# Altium PCB Bending_Machine_PCB.PcbDoc
Units mm, origin at the board's own origin, x right, y up, seen from the top; angles counter-clockwise.
Board outline 121.92 x 83.82 mm, 2 copper layers (Top Layer, Bottom Layer); 32 components, 46 nets, 197 pads, 33 vias.
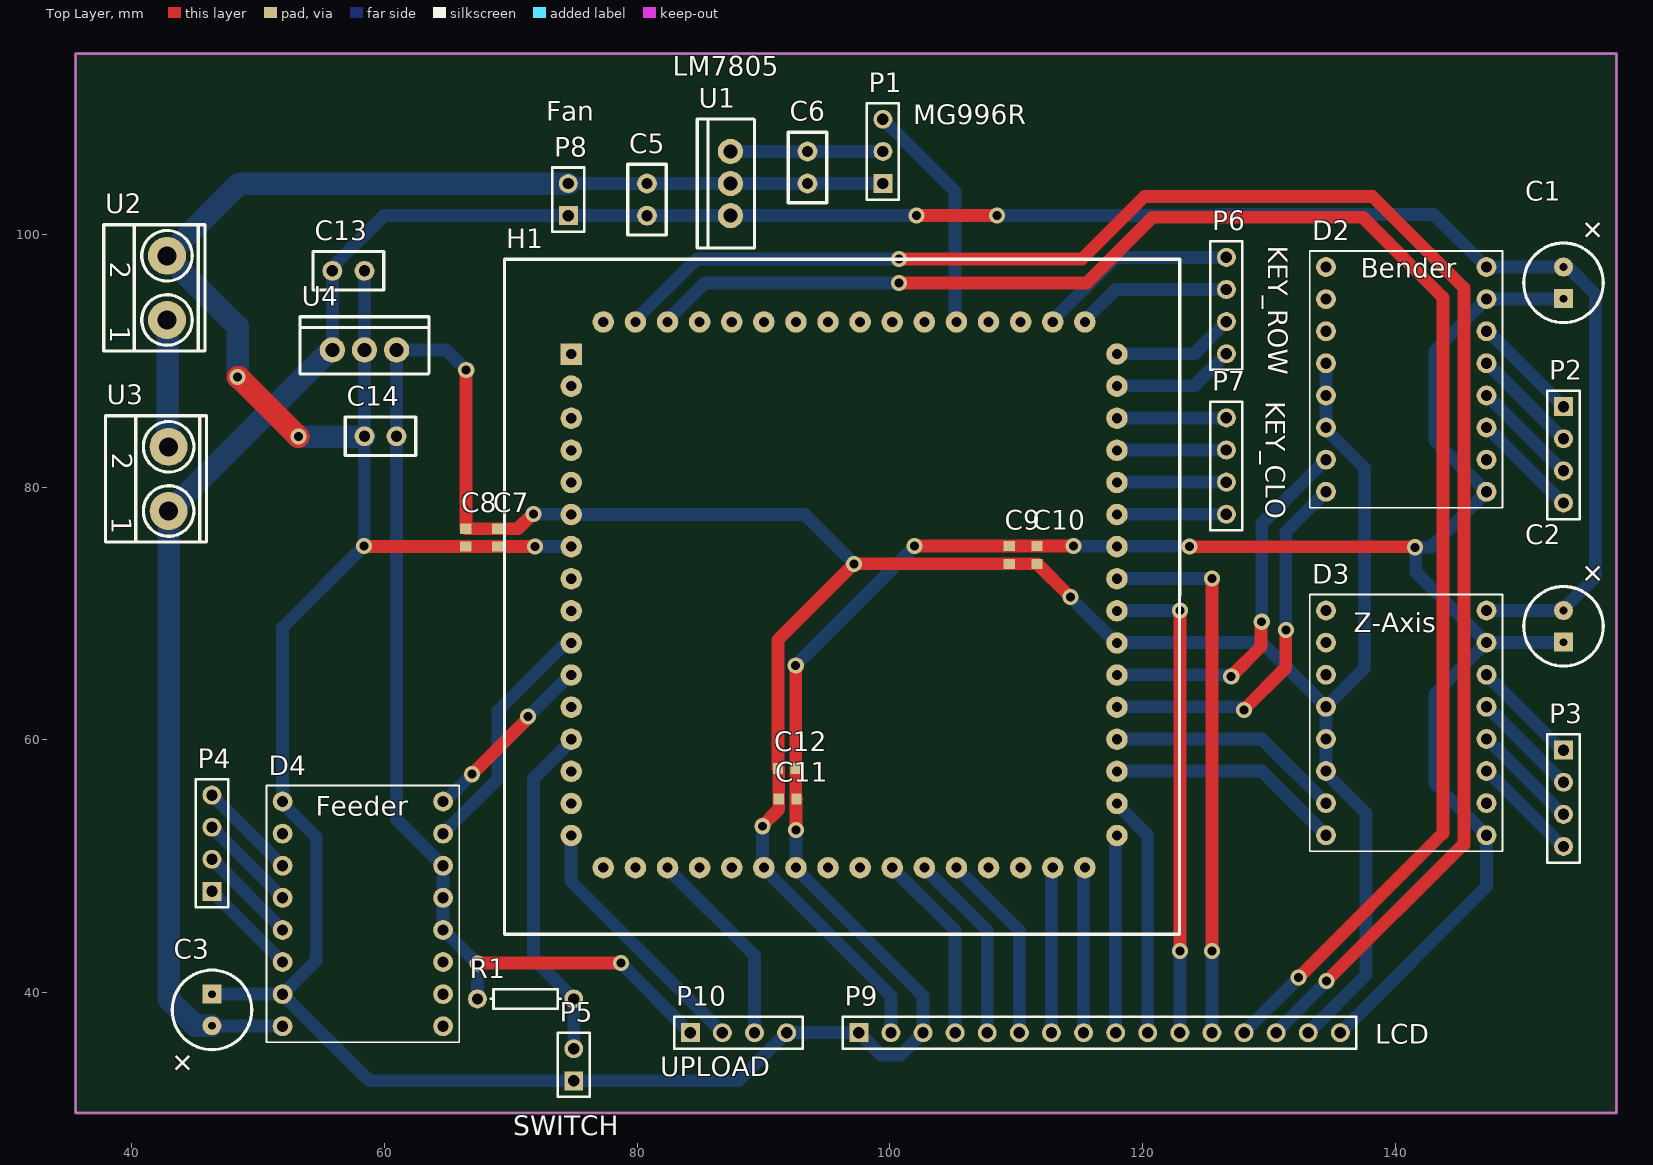
[diagram p0: Top Layer view]
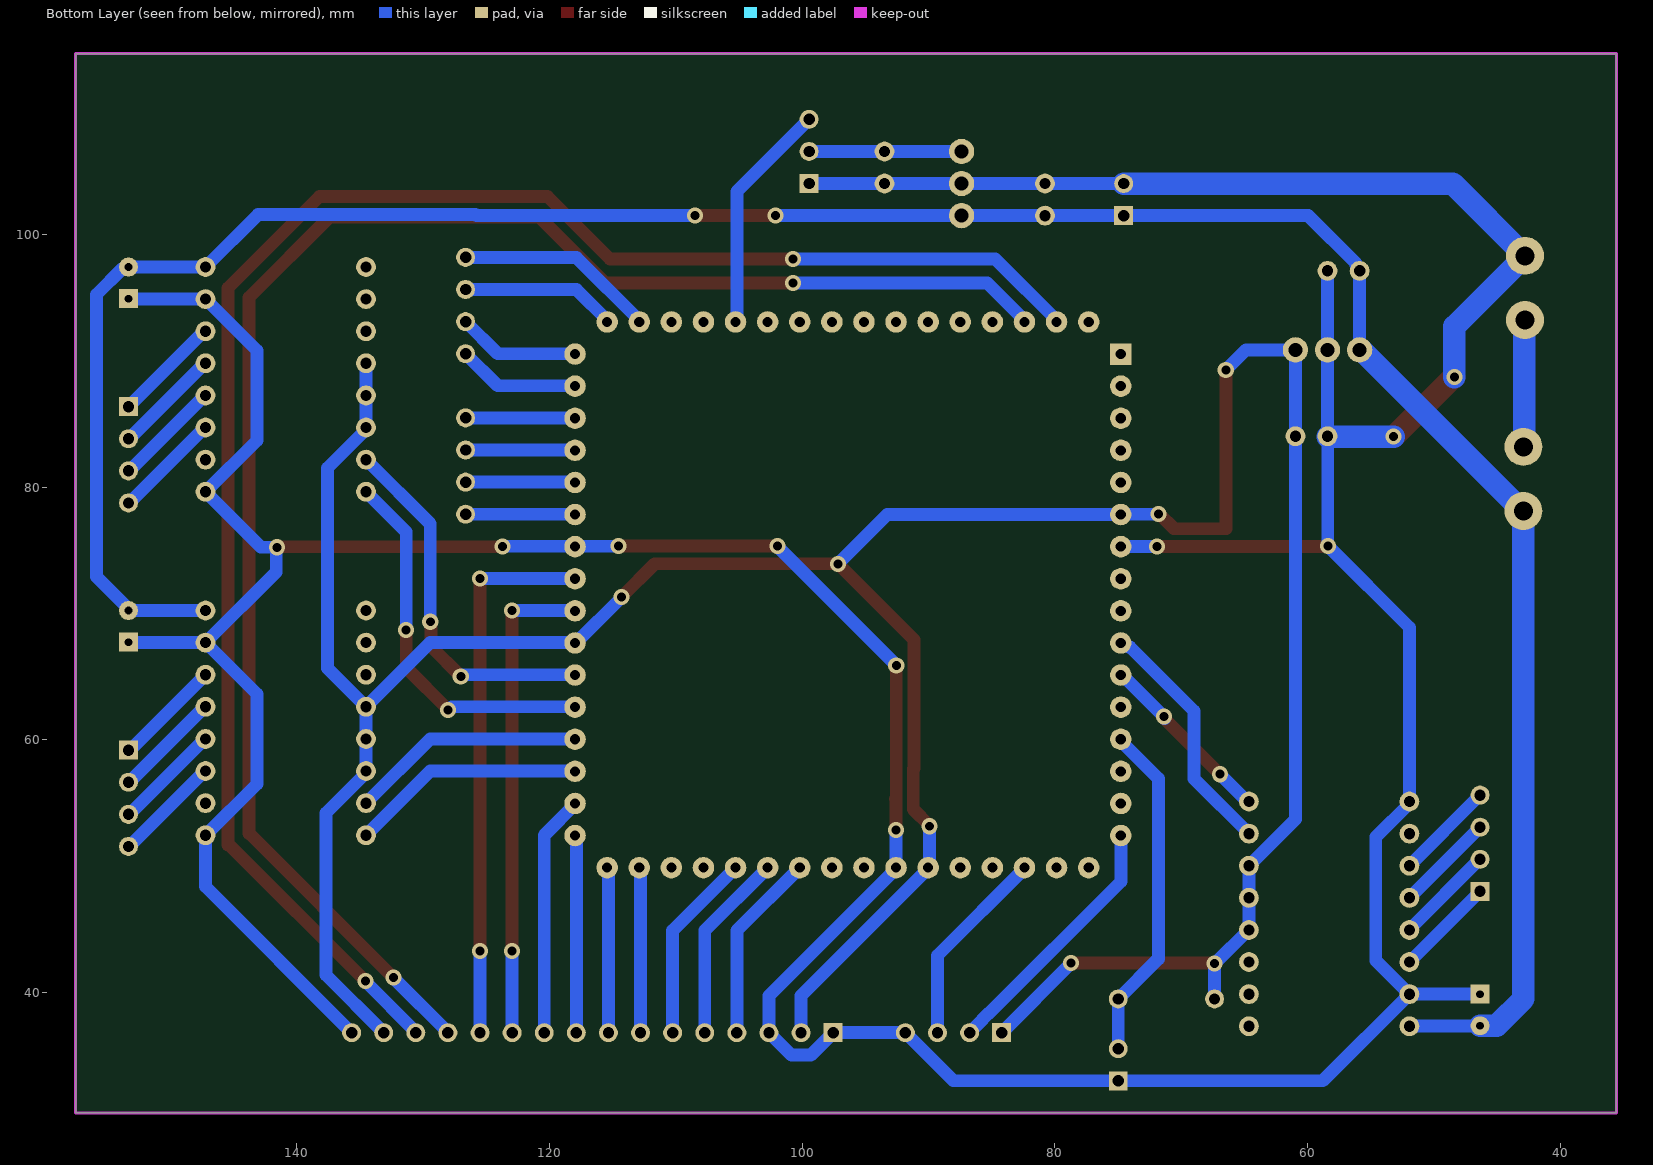
[diagram p1: Bottom Layer view, seen from below]

## Layer stack, top to bottom
Top Solder: solder mask 0.0102, Solder Resist, Dk 3.5
Top Layer: signal copper 0.0356
Dielectric 1: dielectric 0.32, FR-4, Dk 4.8
Bottom Layer: signal copper 0.0356
Bottom Solder: solder mask 0.0102, Solder Resist, Dk 3.5

## Board outline
35.56,30.48 35.56,114.3 157.48,114.3 157.48,30.48

## Design rules (kind name [scope] priority, off if disabled: settings)
Clearance [All] p1: gap=0.254 ignorepadtopadclearanceinfootprint=FALSE except(0: Arc-Hole Track-Hole SMDPad-Hole THPad-Hole Via-Hole Fill-Hole Poly-Hole Region-Hole Text-Hole)
PolygonConnect [All] p1: connectstyle=Relief reliefconductorwidth=0.254 reliefentries=4 polygonreliefangle="90 Angle" airgapwidth=0.254
RoutingVias [All] p1: holewidth=0.711 width=1.27 viastyle="Through Hole" minholewidth=0.711 minwidth=1.27 maxholewidth=0.711 maxwidth=1.27
SolderMaskExpansion [All] p1: expansion=0.102 istentingtop=FALSE
Width [All] p1: maxlimit=1.778 minlimit=0.254 preferedwidth=1.016 minimp=50.000000 maximp=50.000000 favimp=50.000000
30 further rules are at their usual default settings.

## Components (designator, comment, footprint, x,y, rotation, side; value= is the part's Value field where it differs from the comment)
C1 "Cap Pol1" Cap_100uF 153.162,102.87 r270 top value=100uF
C2 "Cap Pol1" Cap_100uF 153.162,75.692 r270 top value=100uF
C3 "Cap Pol1" Cap_100uF 46.482,31.918 r90 top value=100uF
C5 "Cap Pol1" Cap_0.47uF 85.471,102.743 r180 top value=0.47uF
C6 "Cap Pol1" Cap_0.47uF 88.773,105.283 r0 top value=0.47uF
C7 "Cap Semi" 1608[0603] 68.961,75.997 r90 top value=0.1uF
C8 "Cap Semi" 1608[0603] 66.446,75.997 r90 top value=2.2uF
C9 "Cap Semi" 1608[0603] 109.449,74.625 r90 top value=2.2uF
C10 "Cap Semi" 1608[0603] 111.633,74.625 r90 top value=0.1uF
C11 "Cap Semi" 1608[0603] 91.897,55.321 r180 top value=2.2uF
C12 "Cap Semi" 1608[0603] 91.846,57.734 r180 top value=0.1uF
C13 "Cap Pol1" Cap_0.47uF 57.15,92.405 r90 top value=0.47uF
C14 "Cap Pol1" Cap_0.47uF 59.69,88.722 r270 top value=0.47uF
D2 "DRV8825" DRV8825 135.509,124.079 r270 top
D3 "DRV8825" DRV8825 135.509,96.901 r270 top
D4 "DRV8825" DRV8825 63.627,10.668 r90 top
H1 "HT66F2390" HT66F2390_Bord 71.808,65.036 r0 top
P1 "MG996R" HDR1X3 99.441,104.013 r90 top
P2 "NEMA23" HDR1X4#1 153.289,86.36 r270 top
P3 "NEMA17" HDR1X4#1 153.289,59.182 r270 top
P4 "NEMA17" HDR1X4#1 46.355,48.006 r90 top
P5 "MicroSwitch" HDR1X2 74.981,33.02 r90 top
P6 "Row" HDR1X4#2 126.619,90.551 r90 top
P7 "Column" HDR1X4#2 126.619,77.851 r90 top
P8 "Fan" HDR1X2 74.549,101.473 r90 top
P9 "LCD" HDR1X16 97.536,36.83 r0 top
P10 "Upload" HDR1X4#1 84.201,36.83 r0 top
R1 "Res1" AXIAL-0.3 71.171,39.497 r0 top value=1K
U1 "LM7805" LM7805 87.376,110.871 r270 top
U2 "Terminal_Block" "terminal block" 49.215,97.803 r180 top
U3 "Terminal_Block" "terminal block" 49.342,82.69 r180 top
U4 "LM7805" LM7805 65.278,90.856 r180 top

## Footprints (in the part's own frame and the unit in brackets; to place one, negate y for a bottom-side part, rotate by r counter-clockwise, add the part's x,y. Pads: shape width x height; smd on the part's side, far side on the other; paste and mask are expansions set on the pad)
1608[0603] [mm] "Chip Capacitor, Body 1.6x0.8mm, IPC High Density"
  rect 0.8x0.9 smd: 1(-0.7,0) 2(0.7,0)
  body extent -0.87,-0.48 0.87,0.48, height 1.3
AXIAL-0.3 [mm] "Axial Device, Thru-Hole; 2 Leads; 0.3 in Pin Spacing"
  round 1.5 hole 0.9: 1(-3.81,0) 2(3.81,0)
  silkscreen extent -2.77,-0.76 2.77,0.76
Cap_0.47uF [mm]
  round 1.57 hole 0.89 paste+0 mask+0.051: 1(4.699,1.27) 2(4.699,-1.27)
  silkscreen extent 3.17,-2.79 6.22,2.79
Cap_100uF [mm]
  round 1.5 hole 0.6 paste+0 mask+0.051: 1(5.461,0.127)
  rect 1.5x1.5 hole 0.6 paste+0 mask+0.051: 2(7.96,0.127)
  silkscreen extent 3.56,-3.02 9.86,3.28
DRV8825 [mm]
  round 1.57 hole 0.89 paste+0 mask+0.051: 1(26.67,-1.016) 2(29.21,-1.016) 3(31.75,-1.016) 4(34.29,-1.016) 5(36.83,-1.016) 6(39.37,-1.016) 7(41.91,-1.016) 8(44.45,-1.016) 9(44.45,11.684) 10(41.91,11.684) 11(39.37,11.684) 12(36.83,11.684) 13(34.29,11.684) 14(31.75,11.684) 15(29.21,11.684) 16(26.67,11.684)
  silkscreen extent 25.4,-2.29 45.72,12.95
HDR1X2 [mm] "Connector; Header; 2 Position"
  rect 1.5x1.5 hole 0.9: 1(0,0)
  round 1.5 hole 0.9: 2(2.54,0)
  silkscreen extent -1.27,-1.27 3.81,1.27
HDR1X3 [mm] "Connector; Header; 3 Position"
  rect 1.5x1.5 hole 0.9: 1(0,0)
  round 1.5 hole 0.9: 2(2.54,0) 3(5.08,0)
  silkscreen extent -1.27,-1.27 6.35,1.27
HDR1X4#1 [mm] "Connector; Header; 4 Position"
  rect 1.5x1.5 hole 0.9: 1(0,0)
  round 1.5 hole 0.9: 2(2.54,0) 3(5.08,0) 4(7.62,0)
  silkscreen extent -1.27,-1.27 8.89,1.27
HDR1X4#2 [mm] "Connector; Header; 4 Position"
  round 1.5 hole 0.9: 1(0,0) 2(2.54,0) 3(5.08,0) 4(7.62,0)
  silkscreen extent -1.27,-1.27 8.89,1.27
HDR1X16 [mm] "Connector; Header; 16 Position"
  rect 1.5x1.5 hole 0.9: 1(0,0)
  round 1.5 hole 0.9: 2(2.54,0) 3(5.08,0) 4(7.62,0) 5(10.16,0) 6(12.7,0) 7(15.24,0) 8(17.78,0) 9(20.32,0) 10(22.86,0) 11(25.4,0) 12(27.94,0) 13(30.48,0) 14(33.02,0) 15(35.56,0) 16(38.1,0)
  silkscreen extent -1.27,-1.27 39.37,1.27
HT66F2390_Bord [mm]
  rect 1.7x1.7 hole 0.8: 1(2.97,25.49)
  round 1.7 hole 0.8: 2(2.97,22.95) 3(2.97,20.41) 4(2.97,17.87) 5(2.97,15.33) 6(2.97,12.79) 7(2.97,10.25) 8(2.97,7.71) 9(2.97,5.17) 10(2.97,2.63) 11(2.97,0.09) 12(2.97,-2.45) 13(2.97,-4.99) 14(2.97,-7.53) 15(2.97,-10.07) 16(2.97,-12.61) 17(5.51,-15.15) 18(8.05,-15.15) 19(10.59,-15.15) 20(13.13,-15.15) 21(15.67,-15.15) 22(18.21,-15.15) 23(20.75,-15.15) 24(23.29,-15.15) 25(25.83,-15.15) 26(28.37,-15.15) 27(30.91,-15.15) 28(33.45,-15.15) 29(35.99,-15.15) 30(38.53,-15.15) 31(41.07,-15.15) 32(43.61,-15.15) 33(46.15,-12.61) 34(46.15,-10.07) 35(46.15,-7.53) 36(46.15,-4.99) 37(46.15,-2.45) 38(46.15,0.09) 39(46.15,2.63) 40(46.15,5.17) 41(46.15,7.71) 42(46.15,10.25) 43(46.15,12.79) 44(46.15,15.33) 45(46.15,17.87) 46(46.15,20.41) 47(46.15,22.95) 48(46.15,25.49) 49(43.61,28.03) 50(41.07,28.03) 51(38.53,28.03) 52(35.99,28.03) 53(33.45,28.03) 54(30.91,28.03) 55(28.37,28.03) 56(25.83,28.03) 57(23.29,28.03) 58(20.75,28.03) 59(18.21,28.03) 60(15.67,28.03) 61(13.13,28.03) 62(10.59,28.03) 63(8.05,28.03) 64(5.51,28.03)
  silkscreen extent -2.31,-20.42 51.11,32.99, body extent -2.44,-20.55 51.24,33.12, height 12
LM7805 [mm]
  round 2 hole 1.1 paste+0 mask+0.051: 1(9.398,0) 2(6.858,0) 3(4.318,0)
  silkscreen extent 1.76,-2.62 11.96,1.91
"terminal block" [mm]
  round 3 hole 1.5 paste+0 mask+0.051: 1(6.416,4.585) 2(6.416,-0.495)
  silkscreen extent 3.42,-2.96 11.42,7.04

## Part data
C1 C2 C3 C5 C6 C13 C14: "Polarized Capacitor (Radial)", LatestRevisionDate=17-Jul-2002, LatestRevisionNote="Re-released for DXP Platform.", PackageDescription="Polarized Capacitor (Radial); 2 Leads", PackageReference=RB7.6-15, Published=8-Jun-2000, Publisher="Altium Limited"
C7 C8 C9 C10 C11 C12: "Capacitor (Semiconductor SIM Model)", LatestRevisionDate=29-May-2009, LatestRevisionNote="IPC-7351 Footprint Added.", PackageDescription="Chip Capacitor", PackageReference=C1206, Published=8-Jun-2000, Publisher="Altium Limited"
P1: library part "Header 3", "Header, 3-Pin", LatestRevisionDate=17-Jul-2002, LatestRevisionNote="Re-released for DXP Platform.", Publisher="Altium Limited"
P2 P3 P4 P6 P7 P10: library part "Header 4", "Header, 4-Pin", LatestRevisionDate=17-Jul-2002, LatestRevisionNote="Re-released for DXP Platform.", Publisher="Altium Limited"
P5 P8: library part "Header 2", "Header, 2-Pin", LatestRevisionDate=17-Jul-2002, LatestRevisionNote="Re-released for DXP Platform.", Publisher="Altium Limited"
P9: library part "Header 16", "Header, 16-Pin", LatestRevisionDate=17-Jul-2002, LatestRevisionNote="Re-released for DXP Platform.", Publisher="Altium Limited"
R1: "Resistor", LatestRevisionDate=17-Jul-2002, LatestRevisionNote="Re-released for DXP Platform.", PackageDescription="Axial Device, Thru-Hole; 2 Leads; 0.3 in Pin Spacing", PackageReference=AXIAL-0.3, Published=8-Jun-2000, Publisher="Altium Limited"
U2 U3: library part "Terminal Block"

## Via types
v1: diameter 1.27, hole 0.711, Top Layer to Bottom Layer, 33 vias

## Nets (pads, with @x,y where several pads share a name; then routed paths per layer and width w, separated by ;. In a path a pad name is that pad's centre, name@x,y a point inside that pad or via, vN(x,y) a via of type N, cw(c..) or ccw(c..) an arc to the next point about the centre after c; other vN are vias at no path point)
+12: U2.1 U3.2 | length 10.1
  Bottom Layer w1.778: U2.1 42.862,93.154 42.862,83.248 U3.2
DIR_Bender: D2.8 H1.37 | length 30.2
  Top Layer w1.016: v1(128.016,62.357) 128.016,62.396 131.318,65.698 v1(131.318,68.707)
  Bottom Layer w1.016: H1.37@117.856,62.611 127.693,62.611 127.947,62.357 v1(128.016,62.357) ; v1(131.318,68.707) 131.318,76.454 D2.8
DIR_Feeder: D4.8 H1.11 | length 14.3
  Top Layer w1.016: v1(66.929,57.277) 71.325,61.673 71.325,61.8 v1(71.374,61.849)
  Bottom Layer w1.016: D4.8@64.749,55.097 v1@66.88,57.228 ; v1@71.325,61.673 71.325,61.8 v1(71.374,61.849) H1.11@74.676,65.151
DIR_Z_Axis: D3.8 H1.35 | length 18.7
  Bottom Layer w1.016: H1.35@117.856,57.531 129.413,57.531 D3.8
GND: C1.2 C2.2 C3.2 C5.2 C6.2 C7.1 C8.1 C9.2 C10.2 C11.1 C12.1 C13.2 C14.2 D2.9 D2.15 D3.9 D3.15 D4.9 D4.15 H1.7 H1.23 H1.42 P1.1 P5.1 P8.2 P9.1 P9.3 P9.16 P10.4 U1.2 U2.2 U4.2 | length 397.2
  Top Layer w1.016: v1(58.395,75.336) 58.434,75.297 C7.1 71.896,75.297 v1(71.907,75.286) ; H1.7@74.676,75.311 H1.7@74.687,75.322 ; H1.23@92.325,50.042 H1.23@92.456,49.911 ; v1(92.543,65.888) 92.546,65.885 92.546,55.372 C11.1 92.558,55.282 v1(92.558,52.857) ; v1(101.956,75.336) 101.967,75.325 C9.2 114.517,75.325 v1(114.529,75.336) ; v1(123.698,75.311) 123.736,75.273 141.516,75.273 v1(141.554,75.235)
  Top Layer w1.778: v1(48.387,88.697) 48.463,88.697 53.162,83.998 v1(53.188,83.998)
  Bottom Layer w1.016: C3.2 D4.15 ; C13.2 U4.2 C14.2 58.407,84.01 58.407,75.349 51.943,68.885 D4.9 51.943,54.968 54.61,52.301 54.61,42.545 D4.15 ; v1(71.907,75.286) 71.92,75.298 74.663,75.298 H1.7@74.682,75.317 ; P8.2 C5.2 U1.2 C6.2 P1.1 ; H1.23@92.456,49.911 102.616,39.751 P9.3 100.838,35.052 99.314,35.052 P9.1 P10.4 88.011,33.02 P5.1 58.801,33.02 D4.15 ; v1(92.543,65.888) 92.543,65.899 101.956,75.311 v1(101.956,75.336) ; H1.23 v1(92.558,52.857) ; v1(114.529,75.336) 114.554,75.311 117.856,75.311 v1(123.698,75.311) ; P9.16 147.193,48.387 D3.9 143.129,56.515 143.129,63.627 D3.15 ; C2.2 153.269,67.711 147.213,67.711 D3.15 ; C1.2 153.269,94.889 147.213,94.889 D2.15 143.129,90.805 143.129,83.693 D2.9 142.799,75.235 v1(141.554,75.235) 141.603,75.186 141.603,73.281 D3.15
  Bottom Layer w1.778: v1(48.387,88.697) 48.387,92.71 U2.2 48.514,104.013 P8.2 ; v1(53.188,83.998) C14.2@58.395,83.998
KEY_CLO_1: H1.43 P7.1 | length 8.8
  Bottom Layer w1.016: H1.43@117.856,77.851 P7.1
KEY_CLO_2: H1.44 P7.2 | length 8.8
  Bottom Layer w1.016: H1.44@117.856,80.391 P7.2
KEY_CLO_3: H1.45 P7.3 | length 8.8
  Bottom Layer w1.016: H1.45@117.856,82.931 P7.3
KEY_CLO_4: H1.46 P7.4 | length 8.8
  Bottom Layer w1.016: H1.46@117.856,85.471 P7.4
KEY_ROW_1: H1.47 P6.1 | length 9.8
  Bottom Layer w1.016: H1.47@117.856,88.011 124.079,88.011 P6.1
KEY_ROW_2: H1.48 P6.2 | length 9.8
  Bottom Layer w1.016: H1.48@117.856,90.551 124.079,90.551 P6.2
KEY_ROW_3: H1.49 P6.3 | length 12.4
  Bottom Layer w1.016: H1.49@115.316,93.091 117.856,95.631 P6.3
KEY_ROW_4: H1.50 P6.4 | length 15.9
  Bottom Layer w1.016: H1.50@112.776,93.091 117.856,98.171 P6.4
LCD_D0: H1.31 P9.7 | length 13.1
  Bottom Layer w1.016: P9.7 H1.31@112.776,49.911
LCD_D1: H1.32 P9.8 | length 13.1
  Bottom Layer w1.016: P9.8 H1.32@115.316,49.911
LCD_D2: H1.33 P9.9 | length 15.6
  Bottom Layer w1.016: P9.9 H1.33@117.856,52.451
LCD_D3: H1.34 P9.10 | length 19.3
  Bottom Layer w1.016: H1.34@117.856,54.858 117.856,54.991 120.396,52.451 P9.10
LCD_D4: H1.40 P9.11 | length 38.5
  Top Layer w1.016: v1(122.936,43.307) v1(122.936,70.231)
  Bottom Layer w1.016: H1.40@117.856,70.231 v1(122.936,70.231) ; P9.11 v1(122.936,43.307)
LCD_D5: H1.41 P9.12 | length 43.6
  Top Layer w1.016: v1(125.476,43.307) v1(125.476,72.771)
  Bottom Layer w1.016: H1.41@117.856,72.771 v1(125.476,72.771) ; P9.12 v1(125.476,43.307)
LCD_D6: H1.62 P9.13 | length 132.2
  Top Layer w1.016: v1(100.711,96.139) 115.57,96.139 120.777,101.346 137.414,101.346 143.764,94.996 143.764,52.578 143.713,52.578 v1(132.334,41.199)
  Bottom Layer w1.016: H1.62@82.296,93.091 85.344,96.139 v1(100.711,96.139) ; P9.13 128.016,36.855 132.334,41.173 v1(132.334,41.199)
LCD_D7: H1.63 P9.14 | length 137.9
  Top Layer w1.016: v1(100.711,98.044) 115.189,98.044 120.142,102.997 138.176,102.997 145.415,95.758 145.415,51.689 145.313,51.689 v1(134.544,40.919)
  Bottom Layer w1.016: H1.63@79.756,93.091 84.709,98.044 v1(100.711,98.044) ; P9.14 130.556,36.881 134.544,40.869 v1(134.544,40.919)
LCD_E: H1.28 P9.6 | length 15.1
  Bottom Layer w1.016: H1.28 110.236,44.907 P9.6
LCD_RS: H1.26 P9.4 | length 15.1
  Bottom Layer w1.016: H1.26 105.156,44.907 P9.4
LCD_RW: H1.27 P9.5 | length 15.1
  Bottom Layer w1.016: H1.27 107.696,44.907 P9.5
MG996R_D2: H1.53 P1.3 | length 18.4
  Bottom Layer w1.016: P1.3 105.156,103.378 H1.53@105.156,93.091
NetC6_1: C6.1 P1.2 U1.3 | length 12.1
  Bottom Layer w1.016: U1.3 C6.1 P1.2
NetD2_11: D2.11 P2.4 | length 8.6
  Bottom Layer w1.016: D2.11 147.256,84.709 153.225,78.74 P2.4
NetD2_12: D2.12 P2.3 | length 8.6
  Bottom Layer w1.016: D2.12 147.256,87.249 153.225,81.28 P2.3
NetD2_13: D2.13 P2.2 | length 8.6
  Bottom Layer w1.016: D2.13 147.256,89.789 153.225,83.82 P2.2
NetD2_14: D2.14 P2.1 | length 8.6
  Bottom Layer w1.016: D2.14 147.32,92.329 P2.1
NetD3_11: D3.11 P3.4 | length 8.6
  Bottom Layer w1.016: D3.11 147.256,57.531 153.225,51.562 P3.4
NetD3_12: D3.12 P3.3 | length 8.6
  Bottom Layer w1.016: D3.12 147.256,60.071 153.225,54.102 P3.3
NetD3_13: D3.13 P3.2 | length 8.6
  Bottom Layer w1.016: D3.13 147.256,62.611 153.225,56.642 P3.2
NetD3_14: D3.14 P3.1 | length 8.5
  Bottom Layer w1.016: D3.14 P3.1@153.225,59.118
NetD4_11: D4.11 P4.4 | length 7.9
  Bottom Layer w1.016: P4.4 D4.11
NetD4_12: D4.12 P4.3 | length 7.9
  Bottom Layer w1.016: P4.3 D4.12
NetD4_13: D4.13 P4.2 | length 7.9
  Bottom Layer w1.016: P4.2 46.393,50.546 51.943,44.996 D4.13
NetD4_14: D4.14 P4.1 | length 7.9
  Bottom Layer w1.016: P4.1 D4.14
PA0: H1.19 P10.3 | length 16
  Bottom Layer w1.016: H1.19@82.296,49.911 89.281,42.926 P10.3
PA2: H1.16 P10.2 | length 20.6
  Bottom Layer w1.016: H1.16@74.676,52.451 74.77,52.357 74.77,48.801 85.229,38.342 85.267,38.342 85.713,37.896 85.713,37.858 P10.2
STP_Bender: D2.7 H1.38 | length 29.4
  Top Layer w1.016: v1(127,65.024) 129.364,67.388 129.364,69.293 v1(129.413,69.342)
  Bottom Layer w1.016: H1.38@117.856,65.151 126.804,65.151 126.931,65.024 v1(127,65.024) ; v1(129.413,69.342) 129.413,77.089 D2.7
STP_Feeder: D4.7 H1.10 | length 19.4
  Bottom Layer w1.016: D4.7 68.983,56.918 68.983,62.281 74.051,67.349 74.149,67.349 74.491,67.691 H1.10@74.676,67.691
STP_Z_Axis: D3.7 H1.36 | length 18.7
  Bottom Layer w1.016: H1.36@117.856,60.071 129.413,60.071 D3.7
SW_12V: C1.1 C2.1 C3.1 C5.1 C13.1 D2.16 D3.16 D4.16 P8.1 U1.1 U3.1 U4.1 | length 209.6
  Top Layer w1.016: v1(102.108,101.473) v1(108.458,101.473)
  Bottom Layer w1.016: C3.1@46.375,37.358 51.923,37.358 D4.16 ; U4.1 55.88,97.254 56.157,97.531 56.157,97.686 59.944,101.473 P8.1 C5.1 U1.1 v1(102.108,101.473) ; v1(108.458,101.473) 125.749,101.473 125.828,101.551 143.051,101.551 D2.16 C1.1 153.382,97.316 153.737,97.316 155.829,95.225 155.829,72.902 153.289,70.362 C2.1 D3.16
  Bottom Layer w1.778: U3.1 42.926,39.497 45.044,37.379 C3.1 ; U3.1@42.989,78.092 U4.1@55.816,90.919
Switch: H1.13 P5.2 R1.2 | length 27
  Bottom Layer w1.016: H1.13 74.778,59.912 71.806,56.94 71.806,42.672 R1.2 P5.2
VCC_5V: C7.2 C8.2 C9.1 C10.1 C11.2 C12.2 C14.1 D2.4 D2.5 D2.6 D3.4 D3.5 D3.6 D4.4 D4.5 D4.6 H1.6 H1.22 H1.39 P9.2 P9.15 P10.1 R1.1 U4.3 | length 269.9
  Top Layer w1.016: v1(66.472,89.256) 66.446,89.23 C8.2 C7.2 70.557,76.697 71.712,77.851 v1(71.78,77.851) v1@71.732,77.9 ; R1.1@67.399,39.51 R1.1@67.437,39.472 ; v1@67.399,42.278 v1(67.361,42.316) 67.373,42.329 78.702,42.329 v1(78.715,42.342) ; v1@89.891,53.188 v1(89.916,53.162) 89.916,53.231 91.197,54.512 C11.2 91.197,57.683 C12.2 91.146,67.915 v1(97.156,73.925) C9.1 C10.1 111.647,73.925 v1(114.275,71.298)
  Bottom Layer w1.016: v1(66.472,89.256) 64.872,90.856 U4.3 C14.1 60.96,53.721 D4.6 D4.5 D4.4 64.681,44.958 67.323,42.316 v1(67.361,42.316) R1.1 ; v1(71.78,77.851) H1.6@74.676,77.851 ; H1.6 93.256,77.826 v1(97.156,73.925) ; v1(78.715,42.342) 78.715,42.316 P10.1 ; v1(89.916,53.162) 89.916,49.911 100.076,39.751 P9.2 ; v1@114.325,71.272 114.325,71.222 117.856,67.691 129.413,67.691 D3.4 ; P9.15 137.668,41.402 137.668,54.206 134.493,57.381 D3.6 D3.5 D3.4 ; D2.4 D2.5 D2.6 134.493,84.559 137.541,81.511 137.541,65.659 D3.4
pads on no net: D2.1 D2.2 D2.3 D2.10 D3.1 D3.2 D3.3 D3.10 D4.1 D4.2 D4.3 D4.10 H1.1 H1.2 H1.3 H1.4 H1.5 H1.8 H1.9 H1.12 H1.14 H1.15 H1.17 H1.18 H1.20 H1.21 H1.24 H1.25 H1.29 H1.30 H1.51 H1.52 H1.54 H1.55 H1.56 H1.57 H1.58 H1.59 H1.60 H1.61 H1.64

## Keep-outs
Keep-Out Layer:
  the board outline again, w0.254

## Silkscreen, mask and mechanical layers (free items; w line width, h text height)
Top Overlay:
  text "LM7805" at 82.804,112.547 h1.52
  text "Fan" at 72.822,108.966 h1.52
  text "MG996R" at 101.854,108.712 h1.52
  text "KEY_ROW" at 129.946,99.085 h1.52 r270
  text "Bender" at 137.262,96.571 h1.52
  text "KEY_CLO" at 129.743,86.792 h1.52 r270
  text "Z-Axis" at 136.677,68.529 h1.52
  text "Feeder" at 54.585,53.975 h1.52
  text "LCD" at 138.379,35.941 h1.52
  text "UPLOAD" at 81.839,33.376 h1.52
  text "SWITCH" at 70.206,28.727 h1.52

## Text inside footprints (layer, text, board x,y; h text height)
C1: Top Overlay "+" at 154.321,100.524 h1.8 r315
C2: Top Overlay "+" at 154.321,73.346 h1.8 r315
C3: Top Overlay "+" at 45.323,34.263 h1.8 r135
U2: Top Overlay "1" at 38.291,92.768 h1.6 r270; Top Overlay "2" at 38.324,97.838 h1.6 r270
U3: Top Overlay "1" at 38.418,77.655 h1.6 r270; Top Overlay "2" at 38.451,82.725 h1.6 r270